# Altium PCB RiscPC_VRAM.PcbDoc (part 2 of 2)
Units mm, origin at the board's own origin, x right, y up, seen from the top; angles counter-clockwise.
Board outline 102.87 x 28 mm, 4 copper layers (Top Layer, Inner 1, Inner 2, Bottom Layer), stack 2.173 mm thick; 29 components, 122 nets, 498 pads, 421 vias.
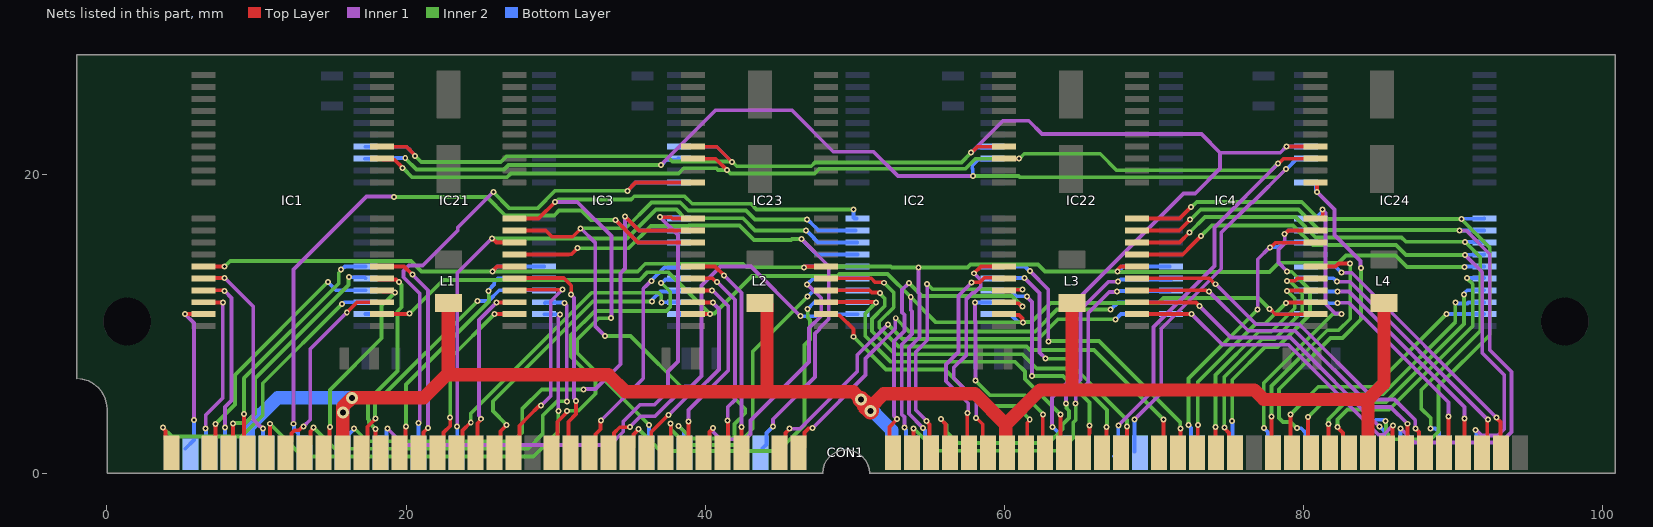
[diagram p4: the nets of this part, all layers, seen from the top]

## Via types
v1: diameter 0.4, hole 0.2, Top Layer to Bottom Layer, tented both sides, 347 vias
v2: diameter 0.8, hole 0.4, Top Layer to Bottom Layer, tented both sides, 46 vias
v3: diameter 0.6, hole 0.3, Top Layer to Bottom Layer, tented both sides, 28 vias

## Nets (pads, with @x,y where several pads share a name; then routed paths per layer and width w, separated by ;. In a path a pad name is that pad's centre, name@x,y a point inside that pad or via, vN(x,y) a via of type N, cw(c..) or ccw(c..) an arc to the next point about the centre after c; other vN are vias at no path point) (continued)
Rd16: CON1.B8 IC3.8 IC23.8 | length 46.8
  Top Layer w0.254: v1(34.011,16.942) 35.502,15.45 IC3.8@39.187,15.45
  Inner 1 w0.254: v1(12.471,3.327) 12.471,13.64 17.358,18.527 19.065,18.527 19.076,18.516 19.149,18.516 v1(19.177,18.488)
  Inner 2 w0.254: v1(19.177,18.488) 25.403,18.488 26.634,17.258 29.907,17.258 30.229,17.58 31.721,17.58 32.36,16.942 v1(34.011,16.942)
  Bottom Layer w0.254: v1(12.471,3.327) 12.499,3.299 12.499,2.969 12.797,2.672 12.797,2.326 CON1.B8@12.971,2.152 ; v1(34.011,16.942) 35.502,15.45 IC23.8@38.246,15.45
Rd17: CON1.B10 IC3.9 IC23.9 | length 42
  Top Layer w0.254: v1(34.641,17.175) 35.566,16.25 IC3.9@39.187,16.25
  Inner 1 w0.254: v1(31.859,5.606) 31.887,5.634 31.99,5.634 32.001,5.646 32.671,5.646 34.328,7.303 34.328,13.389 34.641,13.702 v1(34.641,17.175)
  Inner 2 w0.254: v1(16.532,3.023) 17.396,2.159 27.168,2.159 27.76,2.751 27.76,4.316 29.069,5.625 31.84,5.625 v1(31.859,5.606)
  Bottom Layer w0.254: CON1.B10@15.875,1.428 16.153,1.706 16.153,2.604 16.532,2.983 v1(16.532,3.023) ; v1(34.641,17.175) 35.566,16.25 IC23.9@38.246,16.25
Rd18: CON1.B12 IC3.10 IC23.10 | length 39.4
  Top Layer w0.254: v1(36.976,17.136) 37.727,17.136 37.813,17.05 IC3.10@39.187,17.05
  Inner 1 w0.254: v1(18.771,2.997) 19.863,1.905 33.63,1.905 34.519,2.794 34.519,3.48 35.641,4.602 36.606,4.602 37.502,5.498 37.502,6.827 38.173,7.499 38.173,15.939 v1(36.976,17.136)
  Bottom Layer w0.254: CON1.B12@18.263,1.295 18.693,1.726 18.693,2.88 18.771,2.958 v1(18.771,2.997) ; v1(36.976,17.136) 37.004,17.108 IC23.10@38.758,17.108
Rd19: CON1.B14 IC3.13 IC23.13 | length 39.2
  Top Layer w0.254: v1(34.798,18.904) 35.344,19.45 IC3.13@39.062,19.45
  Inner 1 w0.254: v1(20.821,3.361) 20.821,3.401 20.918,3.498 20.918,12.04 19.833,13.125 19.833,13.543 20.19,13.899 21.112,13.899 23.458,16.245 23.458,16.448 v1(25.832,18.821)
  Inner 2 w0.254: v1(25.832,18.821) 26.924,17.729 28.778,17.729 29.953,18.904 v1(34.798,18.904)
  Bottom Layer w0.254: v1(20.821,3.361) 20.821,1.414 CON1.B14@21.052,1.183 ; v1(34.798,18.904) 35.344,19.45 IC23.13@38.174,19.45
Rd20: CON1.B26 IC3.35 IC23.35 | length 47.4
  Top Layer w0.254: IC3.35@27.143,17.05 28.861,17.05 v1(29.972,18.161)
  Inner 1 w0.254: v1(29.972,18.161) 31.447,18.161 33.728,15.88 33.728,10.403 v1(33.709,10.384)
  Inner 2 w0.254: v1(29.972,18.161) 30.012,18.161 30.18,18.33 35.045,18.33 35.258,18.542 38.621,18.542 39.129,18.034 43.053,18.034 43.434,17.653 v1(49.911,17.653) ; v1(33.709,10.384) 32.863,10.384 31.445,8.966 31.445,8.063 v1(36.25,3.258)
  Bottom Layer w0.254: v1(36.25,3.258) 36.25,1.225 CON1.B26@36.322,1.153 ; v1(49.911,17.653) 49.911,17.123 49.986,17.048 IC23.35@50.105,17.048
Rd21: CON1.B28 IC3.36 IC23.36 | length 52.1
  Top Layer w0.254: IC3.36@27.262,16.25 29.34,16.25 29.757,15.833 31.145,15.833 31.675,16.363 v1(31.675,16.393)
  Inner 1 w0.254: v1(31.675,16.393) 32.654,15.414 32.654,9.835 33.294,9.195 v1(33.299,9.195)
  Inner 2 w0.254: v1(31.675,16.393) 34.681,16.393 36.398,18.11 38.335,18.11 38.868,17.577 42.73,17.577 43.331,16.976 v1(46.808,16.976) ; v1@33.315,9.195 35.001,9.195 38.862,5.334 41.656,5.334 42.672,4.318 42.672,4.028 41.951,3.307 41.951,2.486 41.803,2.337 39.051,2.337 38.868,2.519 38.868,2.534 v1(38.227,3.175)
  Bottom Layer w0.254: v1(38.227,3.175) 38.572,2.83 CON1.B28@38.572,1.443 ; v1(46.808,16.976) 46.837,16.976 47.317,16.496 47.33,16.496 47.576,16.25 IC23.36@50.047,16.25
Rd22: CON1.B16 IC3.37 IC23.37 | length 43.3
  Top Layer w0.254: v1(25.73,15.723) 25.77,15.723 26.042,15.45 IC3.37@27.195,15.45
  Inner 1 w0.254: v1(23.417,3.141) 23.417,13.41 v1(25.73,15.723)
  Inner 2 w0.254: v1(25.73,15.723) 34.773,15.723 36.703,17.653 38.074,17.653 38.658,17.069 42.52,17.069 43.333,16.256 v1(46.736,16.256)
  Bottom Layer w0.254: v1(23.417,3.141) 23.417,1.358 CON1.B16@23.566,1.209 ; v1(46.736,16.256) 46.774,16.256 47.276,15.754 47.276,15.716 47.542,15.45 IC23.37@50.147,15.45
Rd23: CON1.B32 IC3.38 IC23.38 | length 41.1
  Top Layer w0.254: IC3.38@27.262,14.65 30.869,14.65 30.875,14.656 31.055,14.656 31.461,15.062 v1(31.471,15.062)
  Inner 1 w0.254: v1(44.522,3.141) 44.522,3.628 47.346,6.452 47.346,9.366 47.653,9.673 47.653,9.723 48.26,10.331 48.26,13.856 v1(46.446,15.67)
  Inner 2 w0.254: v1(31.471,15.062) 34.874,15.062 36.367,16.555 38.882,16.555 38.91,16.583 42.287,16.583 43.253,15.617 45.738,15.617 45.791,15.67 v1(46.446,15.67)
  Bottom Layer w0.254: CON1.B32@43.815,1.671 44.093,1.949 44.093,2.712 v1(44.522,3.141) ; v1(46.446,15.67) 46.446,15.663 47.459,14.65 IC23.38@50.171,14.65
Rd24: CON1.B51 IC4.8 IC24.8 | length 21.5
  Top Layer w0.254: v1(77.764,15.113) 77.803,15.113 78.112,15.422 80.759,15.422 IC4.8@80.787,15.45
  Inner 1 w0.254: v1(76.937,10.973) 76.937,14.325 77.724,15.113 v1(77.764,15.113)
  Inner 2 w0.254: v1(72.314,3.251) 72.314,6.35 v1(76.937,10.973)
  Bottom Layer w0.254: v1(72.314,3.251) 72.314,3.212 72.479,3.046 72.479,2.411 CON1.B51@73.035,1.855 ; v1(77.764,15.113) 77.792,15.141 78.334,15.141 78.643,15.45 IC24.8@80.162,15.45
Rd25: CON1.B53 IC4.9 IC24.9 | length 21.7
  Top Layer w0.254: v1(78.74,16.003) 78.99,16.253 80.784,16.253 IC4.9@80.787,16.25
  Inner 1 w0.254: v1(78.74,16.003) 78.74,15.385 78.327,14.973 78.327,14.097 v1(78.908,13.516)
  Inner 2 w0.254: v1(75.235,3.505) 75.235,6.274 77.425,8.464 78.264,8.464 80.425,10.625 80.425,12.272 79.209,13.488 78.936,13.488 v1(78.908,13.516)
  Bottom Layer w0.254: v1(75.235,3.505) 75.254,3.486 75.254,2.176 CON1.B53@75.53,1.9 ; v1(78.74,16.003) 78.74,16.009 78.981,16.25 IC24.9@80.162,16.25
Rd26: CON1.B55 IC4.10 IC24.10 | length 21.7
  Top Layer w0.254: IC4.10@80.787,17.05 81.207,17.05 81.28,17.123 v1(81.28,17.653)
  Inner 1 w0.254: v1(81.28,17.653) 81.28,17.613 81.46,17.433 81.46,11.352 82.117,10.696 82.513,10.696 v1(82.541,10.668)
  Inner 2 w0.254: v1(77.343,3.048) 77.343,6.052 81.959,10.668 v1(82.541,10.668)
  Bottom Layer w0.254: v1(77.343,3.048) 77.627,2.764 77.627,2.307 CON1.B55@77.978,1.956 ; IC24.10@80.162,17.05 80.762,17.05 81.252,17.54 81.252,17.625 v1(81.28,17.653)
Rd27: CON1.B57 IC4.13 IC24.13 | length 24.8
  Top Layer w0.254: IC4.13@80.787,19.45 80.826,19.45 80.899,19.377 v1(80.899,18.821)
  Inner 1 w0.254: v1(80.899,18.821) 82.067,17.653 82.067,15.951 83.817,14.201 83.817,13.769 v1(83.845,13.741)
  Inner 2 w0.254: v1(79.562,3.048) 79.523,3.048 79.132,3.438 78.626,3.438 78.359,3.706 78.359,5.632 81.795,9.067 82.6,9.067 83.845,10.312 v1(83.845,13.741)
  Bottom Layer w0.254: v1(79.562,3.048) 79.584,3.026 79.854,3.026 80.142,2.739 80.142,1.503 CON1.B57@80.391,1.254 ; IC24.13@80.162,19.45 80.762,19.45 80.835,19.377 80.835,18.924 80.899,18.861 v1(80.899,18.821)
Rd28: CON1.B60 IC4.35 IC24.35 | length 48.6
  Top Layer w0.254: IC4.35@68.862,17.05 71.707,17.05 v1(72.477,17.82)
  Inner 2 w0.254: v1(72.477,17.82) 72.517,17.82 72.858,18.161 79.879,18.161 81.022,17.018 v1(90.551,17.018) 92.456,15.113 92.456,9.271 89.027,5.842 89.027,2.794 88.519,2.286 85.966,2.286 85.517,2.735 85.517,3.336 85.499,3.355 85.499,3.477 v1(85.471,3.505)
  Bottom Layer w0.254: CON1.B60@84.317,1.393 84.023,1.687 84.506,2.169 84.506,3.273 84.828,3.595 85.342,3.595 85.431,3.505 v1(85.471,3.505) ; v1(90.551,17.018) 90.567,17.034 92.071,17.034 IC24.35@92.087,17.05
Rd29: CON1.B62 IC4.36 IC24.36 | length 49.4
  Top Layer w0.254: IC4.36@68.862,16.25 71.689,16.25 v1(72.424,16.984)
  Inner 1 w0.254: v1(86.487,3.023) 87.427,2.083 93.218,2.083 93.904,2.769 93.904,6.807 92.456,8.255 92.456,14.665 90.893,16.228 90.452,16.228 v1(90.424,16.256)
  Inner 2 w0.254: v1(72.424,16.984) 72.463,16.984 73.132,17.653 79.669,17.653 81.033,16.288 90.288,16.288 90.293,16.284 90.396,16.284 v1(90.424,16.256)
  Bottom Layer w0.254: v1(86.487,3.023) 86.487,1.586 CON1.B62@86.665,1.408 ; v1(90.424,16.256) 90.427,16.253 92.084,16.253 IC24.36@92.087,16.25
Rd30: CON1.B64 IC4.37 IC24.37 | length 41.7
  Top Layer w0.254: IC4.37@68.862,15.45 71.711,15.45 v1(72.39,16.129)
  Inner 2 w0.254: v1(72.39,16.129) 73.406,17.145 79.246,17.145 ; 79.247,17.144 79.459,17.144 80.823,15.78 86.556,15.78 86.843,15.494 v1(90.805,15.494) 91.821,14.478 91.821,9.525 87.865,5.569 87.865,4.348 88.504,3.709 v1(88.504,3.013)
  Bottom Layer w0.254: v1(88.504,3.013) 88.508,3.008 88.813,3.008 89.057,2.764 89.057,1.519 CON1.B64@89.281,1.295 ; v1(90.805,15.494) 90.827,15.472 92.065,15.472 IC24.37@92.087,15.45
Rd31: CON1.B66 IC4.38 IC24.38 | length 40.7
  Top Layer w0.254: IC4.38@68.862,14.65 71.927,14.65 72.555,15.278 v1(73.152,15.875)
  Inner 1 w0.254: v1(90.805,14.605) 91.948,13.462 91.948,8.052 93.421,6.579 93.421,2.972 92.989,2.54 91.917,2.54 91.546,2.911 v1(91.507,2.911)
  Inner 2 w0.254: v1(73.152,15.875) 73.861,16.584 78.981,16.584 ; 78.981,16.583 79.302,16.583 80.613,15.272 86.18,15.272 86.848,14.605 v1(90.805,14.605)
  Bottom Layer w0.254: v1(90.805,14.605) 90.827,14.627 92.065,14.627 IC24.38@92.087,14.65 ; v1(91.507,2.911) 91.507,2.872 91.574,2.804 CON1.B66@91.574,2.098
Sc: CON1.B36 IC1.2 IC2.2 IC3.2 IC4.2 IC21.2 IC22.2 IC23.2 IC24.2 | length 91.6
  Top Layer w0.254: IC1.2@18.239,10.659 18.252,10.672 20.222,10.672 v1(20.244,10.693) ; IC3.2@39.194,10.659 40.323,10.659 v1(40.332,10.668) ; IC2.2@60.022,10.659 60.086,10.595 60.982,10.595 61.212,10.365 61.212,10.135 v1(61.24,10.107) ; v1(77.724,10.998) 77.764,10.998 78.112,10.65 IC4.2@80.787,10.65
  Inner 1 w0.254: v1(53.315,3.073) 53.315,3.775 53.137,3.953 53.137,8.636 53.827,9.326 53.827,10.832 53.741,10.918 v1(53.741,11.791)
  Inner 2 w0.254: v1(20.244,10.693) 22.485,12.935 28.572,12.935 28.576,12.939 32.582,12.939 32.586,12.935 35.622,12.935 36.149,13.462 37.519,13.462 40.313,10.668 v1(40.332,10.668) 40.36,10.696 40.617,10.696 43.129,13.208 48.831,13.208 48.959,13.335 52.197,13.335 v1(53.741,11.791) 55.425,10.107 v1(61.24,10.107) 61.265,10.132 61.821,10.132 63.087,11.398 70.3,11.398 70.633,11.73 72.222,11.73 76.992,11.73 v1(77.724,10.998)
  Bottom Layer w0.254: IC21.2@17.278,10.659 17.291,10.672 20.222,10.672 v1(20.244,10.693) ; IC23.2@38.237,10.659 40.323,10.659 v1(40.332,10.668) ; v1(53.315,3.073) 53.315,3.034 53.429,2.919 CON1.B36@53.429,1.077 ; IC22.2@59.861,10.659 60.385,10.659 60.937,10.107 v1(61.24,10.107) ; v1(77.724,10.998) 77.764,10.998 78.112,10.65 IC24.2@80.162,10.65
Se*: CON1.B37 IC1.39 IC2.39 IC3.39 IC4.39 IC21.39 IC22.39 IC23.39 IC24.39 | length 116.3
  Top Layer w0.254: IC1.39@6.462,13.85 6.466,13.846 7.871,13.846 v1(7.874,13.843) ; v1(25.781,13.516) 25.781,13.546 26.081,13.846 27.259,13.846 IC3.39@27.262,13.85 ; v1(46.609,13.789) 46.649,13.789 46.706,13.846 IC2.39@47.974,13.846 ; v1(67.564,13.516) 67.592,13.544 67.592,13.658 67.78,13.846 68.802,13.846 IC4.39@68.805,13.843
  Inner 1 w0.254: v1(54.254,13.767) 54.255,12.099 54.335,12.019 54.335,9.116 53.619,8.4 53.619,3.991 v1(54.562,3.048)
  Inner 2 w0.254: v1(7.874,13.843) 8.246,14.215 20.323,14.215 21.022,13.516 v1(25.781,13.516) 35.483,13.516 35.988,14.021 42.538,14.021 42.77,13.789 v1(46.609,13.789) ; v1@46.628,13.789 47.263,13.789 47.317,13.843 52.407,13.843 52.484,13.767 57.528,13.767 57.731,13.97 62.255,13.97 62.709,13.516 v1@67.497,13.516 ; v1(67.564,13.516) 67.592,13.488 67.695,13.488 67.716,13.467 77.729,13.467 78.359,14.097 82.363,14.097 82.846,14.58 86.155,14.58 86.921,13.813 v1(90.775,13.813)
  Bottom Layer w0.254: v1(25.781,13.516) 26.111,13.846 29.209,13.846 IC21.39@29.213,13.85 ; v1(46.609,13.789) 46.637,13.817 46.71,13.817 46.739,13.846 IC23.39@50.241,13.846 ; v1(54.562,3.048) 54.562,3.008 54.699,2.872 54.699,1.28 CON1.B37@54.864,1.115 ; v1(67.564,13.516) 67.604,13.516 67.934,13.846 IC22.39@71.056,13.846 ; v1(90.775,13.813) 90.794,13.832 92.069,13.832 IC24.39@92.087,13.85
Ud0: CON1.A1 IC21.3 | length 20.6
  Top Layer w0.254: v1(3.734,3.073) 3.734,3.034 3.907,2.861 3.907,2.326 CON1.A1@4.582,1.651
  Inner 2 w0.254: v1(3.734,3.073) 4.34,2.467 9.006,2.467 10.414,3.875 10.414,6.036 v1(15.716,11.339)
  Bottom Layer w0.254: v1(15.716,11.339) 15.756,11.339 15.867,11.45 IC21.3@17.288,11.45
Ud1: CON1.A3 IC21.4 | length 16.4
  Top Layer w0.254: CON1.A3@7.172,2.32 7.253,2.401 v1(7.253,3.305)
  Inner 2 w0.254: v1(7.253,3.305) 8.56,4.612 8.56,6.587 v1(14.766,12.793)
  Bottom Layer w0.254: v1(14.766,12.793) 15.309,12.25 IC21.4@17.288,12.25
Ud2: CON1.A4 IC21.5 | length 16.7
  Top Layer w0.254: CON1.A4@8.125,1.393 8.433,1.701 v1(8.433,3.353)
  Inner 2 w0.254: v1(8.433,3.353) 8.461,3.381 9.274,3.381 9.906,4.013 9.906,6.35 16.155,12.599 16.155,13.124 v1(16.183,13.152)
  Bottom Layer w0.254: v1(16.183,13.152) 16.223,13.152 16.252,13.123 17.215,13.123 IC21.5@17.288,13.05
Ud3: CON1.A5 IC21.6 | length 16.8
  Top Layer w0.254: v1(9.169,3.988) 9.169,1.786 CON1.A5@9.525,1.43
  Inner 2 w0.254: v1(9.169,3.988) 9.169,6.375 15.494,12.7 15.494,13.428 15.661,13.595 v1(15.661,13.634)
  Bottom Layer w0.254: v1(15.661,13.634) 15.7,13.634 15.912,13.846 17.284,13.846 IC21.6@17.288,13.85
Ud4: CON1.A13 IC21.40 | length 17.1
  Top Layer w0.254: CON1.A13@19.66,1.728 19.963,2.032 19.963,3.123 v1(19.99,3.15)
  Inner 2 w0.254: v1(19.99,3.15) 19.99,5.954 25.546,11.509 25.546,11.763 25.53,11.779 25.53,12.189 v1(25.502,12.217)
  Bottom Layer w0.254: v1(25.502,12.217) 25.502,12.257 25.889,12.644 25.889,12.782 26.145,13.038 IC21.40@29.258,13.038
Ud5: CON1.A11 IC21.41 | length 18.2
  Top Layer w0.254: CON1.A11@17.374,1.159 17.423,1.208 17.423,3.126 17.958,3.661 v1(17.958,3.683)
  Inner 2 w0.254: v1(17.958,3.683) 17.93,3.711 17.93,4.671 v1(24.79,11.532)
  Bottom Layer w0.254: v1(24.79,11.532) 25.513,11.532 26.231,12.25 IC21.41@29.267,12.25
Ud6: CON1.A8 IC21.42 | length 29
  Top Layer w0.254: CON1.A8@13.462,1.775 13.613,1.926 13.613,2.829 13.818,3.034 v1(13.818,3.073)
  Inner 1 w0.254: v1(30.607,11.405) 30.607,11.365 30.743,11.229 v1(30.743,4.826)
  Inner 2 w0.254: v1(13.818,3.073) 15.24,1.651 28.143,1.651 29.13,2.638 29.13,3.857 30.099,4.826 v1(30.743,4.826)
  Bottom Layer w0.254: IC21.42@29.292,11.405 29.314,11.427 30.584,11.427 v1(30.607,11.405)
Ud7: CON1.A6 IC21.43 | length 31.9
  Top Layer w0.254: CON1.A6@10.665,1.393 10.897,1.625 v1(10.897,3.327)
  Inner 1 w0.254: v1(30.18,4.191) 30.18,10.481 30.302,10.603 v1(30.302,10.643)
  Inner 2 w0.254: v1(10.897,3.327) 13.081,1.143 28.524,1.143 30.18,2.799 v1(30.18,4.191)
  Bottom Layer w0.254: IC21.43@29.246,10.65 29.881,10.65 29.886,10.646 30.299,10.646 v1(30.302,10.643)
Ud8: CON1.A43 IC22.3 | length 14.3
  Top Layer w0.254: v1(62.567,3.955) 62.567,1.553 CON1.A43@62.727,1.393
  Inner 1 w0.254: v1(58.039,11.43) 58.039,10.215 58.067,10.187 v1(58.067,6.232)
  Inner 2 w0.254: v1(58.067,6.232) 58.067,6.198 59.026,5.238 61.337,5.238 62.494,4.081 62.494,4.068 62.567,3.995 v1(62.567,3.955)
  Bottom Layer w0.254: v1(58.039,11.43) 58.049,11.44 IC22.3@59.039,11.44
Ud9: CON1.A45 IC22.4 | length 16
  Top Layer w0.254: CON1.A45@65.259,1.401 65.675,1.818 65.675,2.683 65.684,2.692 v1(65.684,3.226)
  Inner 1 w0.254: v1(61.519,11.836) 61.519,11.797 61.849,11.467 61.849,7.884 61.852,7.881 v1(61.852,6.511)
  Inner 2 w0.254: v1(61.852,6.511) 63.923,6.511 65.684,4.75 v1(65.684,3.226)
  Bottom Layer w0.254: IC22.4@59.204,12.25 60.41,12.25 60.811,11.849 61.506,11.849 v1(61.519,11.836)
Ud10: CON1.A47 IC22.5 | length 17.2
  Top Layer w0.254: CON1.A47@67.853,1.964 68.199,2.31 v1(68.199,3.15)
  Inner 1 w0.254: v1(61.341,13.081) 62.357,12.065 62.357,8.094 62.738,7.713 v1(62.738,7.674)
  Inner 2 w0.254: v1(62.738,7.674) 64.106,7.674 68.199,3.581 v1(68.199,3.15)
  Bottom Layer w0.254: IC22.5@59.041,13.038 60.633,13.038 60.675,13.081 v1(61.341,13.081)
Ud11: CON1.A50 IC22.6 | length 20.4
  Top Layer w0.254: CON1.A50@71.704,2.005 71.78,2.081 v1(71.78,2.997)
  Inner 1 w0.254: v1(61.722,13.529) 62.938,12.313 v1(62.938,8.836)
  Inner 2 w0.254: v1(62.938,8.836) 62.966,8.864 66.335,8.864 71.752,3.446 71.752,3.025 v1(71.78,2.997)
  Bottom Layer w0.254: IC22.6@59.197,13.843 61.368,13.843 61.682,13.529 v1(61.722,13.529)
Ud12: CON1.A38 IC22.40 | length 27.3
  Top Layer w0.254: v1(55.778,3.632) 55.778,3.593 56.067,3.304 CON1.A38@56.067,1.608
  Inner 1 w0.254: v1(64.116,4.69) 64.116,5.29 65.097,6.271 65.097,10.951 66.968,12.822 v1(67.609,12.822)
  Inner 2 w0.254: v1(55.778,3.632) 56.146,3.265 56.146,2.783 56.897,2.032 62.95,2.032 63.881,2.963 63.881,3.27 64.327,3.716 64.327,4.197 64.144,4.38 64.144,4.662 v1(64.116,4.69)
  Bottom Layer w0.254: v1(67.609,12.822) 67.649,12.822 67.804,12.977 71.131,12.977 IC22.40@71.244,13.09
Ud13: CON1.A36 IC22.41 | length 27.7
  Top Layer w0.254: CON1.A36@53.709,2.044 53.924,2.259 v1(53.924,3.023)
  Inner 1 w0.254: v1(64.77,4.69) 64.77,5.258 65.605,6.093 65.605,10.741 67.008,12.144 67.511,12.144 v1(67.539,12.172)
  Inner 2 w0.254: v1(53.924,3.023) 55.423,1.524 63.778,1.524 64.608,2.354 64.608,3.421 64.77,3.583 v1(64.77,4.69)
  Bottom Layer w0.254: v1(67.539,12.172) 67.567,12.2 71.079,12.2 IC22.41@71.129,12.25
Ud14: CON1.A34 IC22.42 | length 31.4
  Top Layer w0.254: CON1.A34@46.225,1.393 46.633,1.801 46.633,2.742 46.911,3.02 47.14,3.02 v1(47.168,3.048)
  Inner 1 w0.254: v1(47.168,3.048) 47.193,3.048 50.724,6.579 50.724,7.696 52.71,9.682 52.71,10.353 v1(52.738,10.381)
  Inner 2 w0.254: v1(52.738,10.381) 53.621,9.498 62.06,9.498 63.518,10.956 v1(67.111,10.956)
  Bottom Layer w0.254: v1(67.111,10.956) 67.595,11.44 IC22.42@71.175,11.44
Ud15: CON1.A33 IC22.43 | length 31
  Top Layer w0.254: CON1.A33@45.315,2.363 45.363,2.411 45.363,2.702 45.618,2.958 v1(45.618,2.997)
  Inner 1 w0.254: v1(45.618,2.997) 46.338,2.998 50.169,6.829 50.169,7.918 v1(52.215,9.964)
  Inner 2 w0.254: v1(52.215,9.964) 53.189,8.99 62.271,8.99 63.59,10.309 v1(67.415,10.309)
  Bottom Layer w0.254: v1(67.415,10.309) 67.454,10.309 67.804,10.659 IC22.43@71.257,10.659
Ud16: CON1.A16 IC23.3 | length 20.4
  Top Layer w0.254: CON1.A16@23.368,1.638 23.773,2.043 23.773,2.873 v1(24.324,3.423)
  Inner 2 w0.254: v1(24.324,3.423) 24.324,4.004 32.407,12.087 36.867,12.087 37.056,11.899 37.056,11.468 v1(37.084,11.44)
  Bottom Layer w0.254: v1(37.084,11.44) 37.089,11.445 38.069,11.445 IC23.3@38.074,11.45
Ud17: CON1.A18 IC23.4 | length 19
  Top Layer w0.254: CON1.A18@25.976,2.074 26.313,2.411 26.313,2.829 v1(26.73,3.246)
  Inner 2 w0.254: v1(26.73,3.246) 25.806,4.169 25.806,4.833 32.48,11.506 v1(36.433,11.506)
  Bottom Layer w0.254: v1(36.433,11.506) 36.461,11.534 36.461,11.639 36.999,12.177 38.173,12.177 IC23.4@38.246,12.25
Ud18: CON1.A21 IC23.5 | length 20.1
  Top Layer w0.254: CON1.A21@29.718,2.027 29.739,2.027 30.123,2.411 30.123,3.464 30.718,4.059 30.718,4.164 v1(30.746,4.192)
  Inner 2 w0.254: v1(30.746,4.192) 31.523,4.192 32.664,5.334 32.664,6.172 31.013,7.823 31.013,9.253 32.62,10.859 37.402,10.859 37.665,11.122 37.665,12.15 37.089,12.726 v1(37.049,12.726)
  Bottom Layer w0.254: v1(37.049,12.726) 37.089,12.726 37.339,12.977 38.077,12.977 IC23.5@38.112,13.012
Ud19: CON1.A23 IC23.6 | length 15.3
  Top Layer w0.254: CON1.A23@32.255,1.393 32.663,1.801 32.663,2.626 32.992,2.955 32.992,3.503 v1(33.02,3.531)
  Inner 1 w0.254: v1(33.02,3.531) 35.852,6.363 35.852,12.36 36.073,12.58 36.374,12.881 v1(36.414,12.881)
  Bottom Layer w0.254: v1(36.414,12.881) 36.414,12.919 37.272,13.777 38.008,13.777 IC23.6@38.078,13.846
Ud20: CON1.A29 IC23.40 | length 20.7
  Top Layer w0.254: CON1.A29@40.132,1.695 40.283,1.846 40.283,2.778 40.513,3.008 v1(40.513,3.048)
  Inner 1 w0.254: v1(40.513,3.048) 40.541,3.02 40.541,2.766 41.021,2.286 42.672,2.286 43.028,2.642 43.028,3.549 46.939,7.46 46.939,9.728 47.752,10.541 47.752,11.683 47.752,11.731 47.082,12.401 47.074,12.401 46.876,12.599 46.836,12.599 v1(46.808,12.627)
  Bottom Layer w0.254: v1(46.808,12.627) 47.286,13.105 IC23.40@50.274,13.105
Ud21: CON1.A27 IC23.41 | length 22
  Top Layer w0.254: CON1.A27@37.444,2.112 37.694,2.362 v1(37.694,3.353)
  Inner 2 w0.254: v1(37.694,3.353) 37.722,3.325 37.722,2.948 38.764,1.905 42.088,1.905 43.174,2.991 43.174,8.152 v1(46.841,11.82)
  Bottom Layer w0.254: v1(46.841,11.82) 47.272,12.25 IC23.41@50.171,12.25
Ud22: CON1.A25 IC23.42 | length 25.9
  Top Layer w0.254: CON1.A25@34.795,1.393 35.203,1.801 35.203,2.601 35.535,2.932 v1(35.535,2.972)
  Inner 2 w0.254: v1(35.535,2.972) 37.008,1.499 44.882,1.499 46.634,3.251 46.634,8.582 47.015,8.963 47.015,10.274 46.857,10.431 46.857,10.958 v1(46.829,10.986)
  Bottom Layer w0.254: v1(46.829,10.986) 47.293,11.45 IC23.42@50.295,11.45
Ud23: CON1.A24 IC23.43 | length 26.9
  Top Layer w0.254: CON1.A24@33.427,1.905 33.91,2.388 33.91,2.719 34.287,3.096 34.948,3.096 v1(34.976,3.124)
  Inner 1 w0.254: v1(34.976,3.124) 35.676,3.825 36.651,3.825 38.649,5.823 39.058,5.823 39.751,6.515 39.751,12.573 41.021,13.843 43.053,13.843 v1(46.38,10.516)
  Bottom Layer w0.254: v1(46.38,10.516) 47.371,10.516 47.505,10.65 IC23.43@50.171,10.65
Ud24: CON1.A64 IC24.3 | length 15.7
  Top Layer w0.254: CON1.A64@89.1,1.621 89.662,2.183 89.662,2.234 89.687,2.259 v1(89.687,3.81)
  Inner 1 w0.254: v1(82.282,11.389) 82.31,11.416 82.734,11.416 82.736,11.418 83.037,11.418 89.687,4.768 v1(89.687,3.81)
  Bottom Layer w0.254: IC24.3@80.162,11.45 80.172,11.44 81.574,11.44 81.626,11.389 v1(82.282,11.389)
Ud25: CON1.A65 IC24.4 | length 16.9
  Top Layer w0.254: CON1.A65@90.667,1.393 90.754,1.48 90.754,3.683 v1(90.76,3.689)
  Inner 1 w0.254: v1(82.266,12.162) 83.044,12.162 90.76,4.447 v1(90.76,3.689)
  Bottom Layer w0.254: IC24.4@80.162,12.25 81.534,12.25 81.622,12.162 v1(82.266,12.162)
Ud26: CON1.A66 IC24.5 | length 17.6
  Top Layer w0.254: CON1.A66@92.075,2.159 92.28,2.364 92.28,3.528 92.331,3.579 v1(92.331,3.619)
  Inner 1 w0.254: v1(82.239,12.844) 82.267,12.816 83.108,12.816 92.306,3.619 v1(92.331,3.619)
  Bottom Layer w0.254: IC24.5@80.162,13.05 81.994,13.05 82.199,12.844 v1(82.239,12.844)
Ud27: CON1.A67 IC24.6 | length 19.2
  Top Layer w0.254: v1(92.913,3.734) 92.913,3.694 93.167,3.44 CON1.A67@93.167,1.619
  Inner 1 w0.254: v1(82.541,13.425) 83.222,13.425 v1(92.913,3.734)
  Bottom Layer w0.254: IC24.6@80.162,13.85 80.166,13.846 82.119,13.846 v1(82.541,13.425)
Ud28: CON1.A59 IC24.40 | length 18.7
  Top Layer w0.254: v1(82.271,3.124) 82.271,3.085 82.639,2.716 82.639,1.801 CON1.A59@83.047,1.393
  Inner 2 w0.254: v1(82.271,3.124) 82.271,3.609 82.943,4.281 85.256,4.281 85.728,4.281 91.313,9.866 91.313,12.66 90.932,13.041 v1(90.932,13.081)
  Bottom Layer w0.254: v1(90.932,13.081) 90.948,13.065 92.072,13.065 IC24.40@92.087,13.05
Ud29: CON1.A58 IC24.41 | length 17.7
  Top Layer w0.254: v1(81.661,3.302) 81.661,1.685 81.777,1.801 CON1.A58@81.777,1.393
  Inner 2 w0.254: v1(81.661,3.302) 81.661,3.632 82.818,4.789 85.518,4.789 90.732,10.004 v1(90.732,11.954)
  Bottom Layer w0.254: v1(90.732,11.954) 90.76,11.982 90.76,12.062 90.948,12.25 IC24.41@92.087,12.25
Ud30: CON1.A57 IC24.42 | length 18.2
  Top Layer w0.254: v1(80.307,3.767) 80.307,1.593 80.407,1.493 CON1.A57@80.507,1.393
  Inner 2 w0.254: v1(80.307,3.767) 81.838,5.297 85.307,5.297 90.151,10.141 v1(90.151,11.43)
  Bottom Layer w0.254: v1(90.151,11.43) 90.191,11.43 90.248,11.373 90.973,11.373 91.04,11.44 92.077,11.44 IC24.42@92.087,11.45
Ud31: CON1.A56 IC24.43 | length 18.8
  Top Layer w0.254: v1(79.121,3.937) 79.121,1.685 78.829,1.393 CON1.A56@79.237,1.393
  Inner 2 w0.254: v1(79.121,3.937) 80.989,5.805 84.707,5.805 v1(89.57,10.668)
  Bottom Layer w0.254: v1(89.57,10.668) 89.579,10.659 92.078,10.659 IC24.43@92.087,10.65
VCC: CON1.A10 CON1.A41 CON1.A60 CON1.B5 CON1.B35 L1.1 L2.1 L3.1 L4.1 | length 120
  Top Layer w0.889: CON1.A10@15.773,1.372 15.773,4.451 v2(16.383,5.061) 21.19,5.061 22.733,6.604 ; L1.1@22.825,11.4 22.825,6.696 22.733,6.604 ; L2.1@43.675,11.4 43.975,11.4 44.13,11.244 44.13,5.461 ; v2(50.419,4.953) 49.911,5.461 44.13,5.461 ; v2@50.99,4.381 51.943,5.334 58.039,5.334 60.097,3.277 ; CON1.A41@60.187,1.393 60.097,1.483 60.097,3.277 ; L3.1@64.525,11.4 64.525,5.724 64.389,5.588 ; 84.201,4.953 77.343,4.953 76.708,5.588 64.389,5.588 ; CON1.A60@84.317,1.393 84.317,4.953 85.375,6.011 L4.1@85.375,11.4 ; 22.733,6.604 33.528,6.604 34.671,5.461 44.13,5.461 ; 60.097,3.277 62.408,5.588 64.389,5.588
  Top Layer w1.143: v2(50.419,4.953) 50.673,4.699 50.673,4.572 v2(51.054,4.191)
  Bottom Layer w0.889: CON1.B5@9.305,1.411 9.463,1.57 9.463,3.113 11.411,5.061 15.773,5.061 ; v2(15.773,4.089) 15.773,4.801 16.034,5.061 v2(16.383,5.061) ; v2(50.419,4.953) 52.477,2.895 52.477,1.703 CON1.B35@52.658,1.522
Vcd0: CON1.A7 IC1.3 | length 13.3
  Top Layer w0.254: CON1.A7@12.065,1.91 12.343,2.188 12.343,2.691 12.538,2.886 12.829,2.886 13.092,3.15 v1(13.132,3.15) ; v1(16.034,10.767) 16.717,11.45 IC1.3@18.387,11.45
  Inner 1 w0.254: v1(13.132,3.15) 13.143,3.15 13.589,3.596 13.589,8.322 v1(16.034,10.767)
Vcd1: CON1.A9 IC1.4 | length 13.6
  Top Layer w0.254: CON1.A9@14.475,1.393 14.883,1.801 14.883,3.072 v1(14.91,3.099) ; IC1.4@18.387,12.25 18.46,12.177 19.135,12.177 19.21,12.102 v1(19.25,12.102)
  Inner 2 w0.254: v1(14.91,3.099) 14.91,5.588 18.364,9.042 18.364,11.216 v1(19.25,12.102)
Vcd2: CON1.A12 IC1.5 | length 14.2
  Top Layer w0.254: v1(17.958,2.972) 17.958,1.72 CON1.A12@18.285,1.393 ; IC1.5@18.117,12.977 19.318,12.977 19.493,12.802 v1(19.533,12.802)
  Inner 2 w0.254: v1(17.958,2.972) 17.517,3.413 17.517,3.576 17.456,3.637 17.456,4.883 19.425,6.852 19.425,10.851 19.691,11.117 19.691,12.603 19.533,12.762 v1(19.533,12.802)
Vcd3: CON1.A14 IC1.6 | length 14.8
  Top Layer w0.254: IC1.6@18.387,13.85 18.391,13.846 19.87,13.846 v1(20.414,13.302) ; CON1.A14@21.082,1.374 21.172,1.464 21.172,2.757 v1(21.463,3.048)
  Inner 1 w0.254: v1(20.414,13.302) 21.463,12.254 v1(21.463,3.048)
Vcd4: CON1.B6 IC1.40 | length 14.5
  Top Layer w0.254: IC1.40@6.462,13.05 6.478,13.065 7.858,13.065 v1(7.874,13.081)
  Inner 1 w0.254: v1(7.874,13.081) 9.779,11.176 9.779,3.614 10.244,3.15 10.273,3.15 10.403,3.019 v1(10.443,3.019)
  Bottom Layer w0.254: v1(10.443,3.019) 10.443,2.023 CON1.B6@11.073,1.393
Vcd5: CON1.B4 IC1.41 | length 12.7
  Top Layer w0.254: IC1.41@6.462,12.25 7.777,12.25 7.834,12.192 v1(7.874,12.192)
  Inner 1 w0.254: v1(7.874,12.192) 8.328,11.738 8.328,4.874 7.899,4.445 v1(7.899,3.073)
  Bottom Layer w0.254: v1(7.899,3.073) 7.899,1.619 CON1.B4@8.125,1.393
Vcd6: CON1.B3 IC1.42 | length 11.9
  Top Layer w0.254: IC1.42@6.462,11.45 6.472,11.44 7.737,11.44 v1(7.747,11.43)
  Inner 1 w0.254: v1(6.604,2.997) 6.604,3.912 7.747,5.055 v1(7.747,11.43)
  Bottom Layer w0.254: v1(6.604,2.997) 6.632,2.969 6.632,1.616 CON1.B3@6.855,1.393
Vcd7: CON1.B2 IC1.43 | length 10.8
  Top Layer w0.254: v1(5.207,10.668) 5.216,10.659 6.453,10.659 IC1.43@6.462,10.65
  Inner 1 w0.254: v1(5.207,10.668) 5.817,10.058 v1(5.817,3.581)
  Bottom Layer w0.254: CON1.B2@5.233,1.651 5.817,2.235 v1(5.817,3.581)
Vcd8: CON1.A35 IC2.3 | length 21.4
  Top Layer w0.254: CON1.A35@52.324,1.675 52.324,3.12 52.81,3.606 v1(52.81,3.635) ; IC2.3@60.053,11.44 60.116,11.377 60.964,11.377 61.184,11.157 v1(61.224,11.157)
  Inner 1 w0.254: v1(52.81,3.635) 52.81,3.675 52.629,3.856 52.629,8.847 53.319,9.537 53.319,10.613 53.16,10.772 53.16,12.286 v1(53.614,12.74)
  Inner 2 w0.254: v1(53.614,12.74) 53.629,12.74 54.497,11.871 60.509,11.871 v1(61.224,11.157)
Vcd9: CON1.A37 IC2.4 | length 19.6
  Top Layer w0.254: v1(54.799,3.526) 54.799,3.487 55.004,3.282 55.004,1.815 CON1.A37@54.864,1.675 ; IC2.4@59.987,12.225 60.053,12.291 61.186,12.291 v1(61.214,12.319)
  Inner 1 w0.254: v1(54.799,3.526) 54.071,4.254 54.071,8.134 54.843,8.905 54.843,12.665 v1(54.836,12.672)
  Inner 2 w0.254: v1(54.836,12.672) 55.189,12.319 v1(61.214,12.319)
Vcd10: CON1.A39 IC2.5 | length 15.8
  Top Layer w0.254: v1(57.534,4.06) 57.516,4.042 57.516,1.524 CON1.A39@57.647,1.393 ; v1(57.816,12.76) 57.844,12.788 58.381,12.788 58.677,13.084 IC2.5@60.682,13.084
  Inner 1 w0.254: v1(57.534,4.06) 57.562,4.088 57.562,4.178 57.579,4.195 57.579,4.697 56.103,6.173 56.103,7.292 56.941,8.13 56.941,11.888 57.813,12.76 v1(57.816,12.76)
Vcd11: CON1.A40 IC2.6 | length 15
  Top Layer w0.254: v1(57.972,13.389) 58.429,13.846 IC2.6@59.793,13.846 ; v1(58.097,3.727) 58.118,3.727 58.556,3.289 58.556,2.326 CON1.A40@58.531,2.3
  Inner 1 w0.254: v1(57.972,13.389) 58.42,12.941 58.42,12.506 58.003,12.088 57.876,12.088 57.458,11.671 57.458,7.928 56.611,7.082 56.611,6.383 58.115,4.879 58.115,3.745 v1(58.097,3.727)
Vcd12: CON1.A49 IC2.40 | length 31
  Top Layer w0.254: IC2.40@48.062,13.05 51.1,13.05 51.368,12.782 51.915,12.782 v1(51.943,12.754) ; CON1.A49@70.245,1.983 70.637,2.375 v1(70.637,3.607)
  Inner 2 w0.254: v1(51.943,12.754) 52.6,12.097 52.6,11.111 51.638,10.149 51.638,9.77 52.926,8.482 61.495,8.482 61.722,8.255 65.989,8.255 v1(70.637,3.607)
Vcd13: CON1.A46 IC2.41 | length 27.6
  Top Layer w0.254: IC2.41@48.062,12.25 50.981,12.25 51.138,12.093 51.661,12.093 v1(51.689,12.065) ; CON1.A46@66.537,1.393 66.827,1.683 v1(66.827,3.124)
  Inner 2 w0.254: v1(51.689,12.065) 51.689,12.025 52.006,11.709 52.006,11.189 51.156,10.339 51.156,9.507 52.688,7.974 61.21,7.974 62.166,7.019 64.076,7.019 66.853,4.242 66.853,3.15 v1(66.827,3.124)
Vcd14: CON1.A44 IC2.42 | length 24.2
  Top Layer w0.254: IC2.42@47.998,11.457 51.397,11.457 v1(51.425,11.43) ; v1(63.746,3.956) 63.746,1.644 CON1.A44@63.997,1.393
  Inner 2 w0.254: v1(51.425,11.43) 50.698,10.704 50.698,9.195 52.427,7.466 60.733,7.466 61.388,6.811 61.388,6.314 v1(63.746,3.956)
Vcd15: CON1.A42 IC2.43 | length 18.6
  Top Layer w0.254: IC2.43@48.662,10.65 48.735,10.577 48.986,10.577 49.911,9.652 v1(49.911,9.144) ; CON1.A42@61.457,1.393 61.526,1.462 61.526,3.397 61.697,3.567 v1(61.697,3.607)
  Inner 2 w0.254: v1(49.911,9.144) 52.095,6.96 56.032,6.96 58.471,4.521 60.782,4.521 v1(61.697,3.607)
Vcd16: CON1.A26 IC3.3 | length 13.6
  Top Layer w0.254: CON1.A26@36.195,1.169 36.386,1.36 36.386,2.77 37.526,3.911 v1(37.558,3.911) ; IC3.3@39.497,11.433 39.506,11.443 40.511,11.443 v1(40.519,11.436)
  Inner 1 w0.254: v1(37.558,3.911) 37.566,3.919 38.963,5.315 39.269,5.315 40.913,6.959 40.913,11.008 40.519,11.403 v1(40.519,11.436)
Vcd17: CON1.A28 IC3.4 | length 13.1
  Top Layer w0.254: CON1.A28@38.723,2.121 38.887,2.285 v1(38.887,3.48) ; IC3.4@39.149,12.267 39.176,12.239 40.45,12.239 v1(40.46,12.229)
  Inner 1 w0.254: v1(38.887,3.48) 38.887,4.242 41.536,6.891 41.536,11.193 40.5,12.229 v1(40.46,12.229)
Vcd18: CON1.A30 IC3.5 | length 13.6
  Top Layer w0.254: IC3.5@39.247,13.026 39.271,13.05 40.495,13.05 40.753,12.793 v1(40.792,12.793) ; CON1.A30@41.497,1.562 41.525,1.59 41.525,3.535 v1(41.504,3.556)
  Inner 1 w0.254: v1(40.792,12.793) 40.81,12.793 41.986,11.616 41.986,4.922 41.504,4.44 v1(41.504,3.556)
Vcd19: CON1.A31 IC3.6 | length 14
  Top Layer w0.254: IC3.6@39.231,13.846 40.662,13.846 v1(41.255,13.255) ; CON1.A31@42.418,1.966 v1(42.418,3.124)
  Inner 1 w0.254: v1(41.255,13.255) 42.422,12.087 42.422,3.128 v1(42.418,3.124)
Vcd20: CON1.A22 IC3.40 | length 16
  Top Layer w0.254: IC3.40@26.806,13.062 30.545,13.062 31.048,12.56 31.048,12 v1(31.023,11.975) ; CON1.A22@30.985,1.393 30.852,1.526 30.852,3.459 31.369,3.977 v1(31.369,4.851)
  Inner 1 w0.254: v1(31.023,11.975) 31.023,11.947 31.217,11.754 31.217,5.043 31.369,4.891 v1(31.369,4.851)
Vcd21: CON1.A19 IC3.41 | length 14.9
  Top Layer w0.254: IC3.41@27.275,12.22 27.346,12.291 30.439,12.291 v1(30.467,12.319) ; CON1.A19@27.432,1.924 27.578,2.07 27.578,3.195 28.24,3.857 28.857,4.474 28.92,4.474 28.993,4.547 v1(29.032,4.547)
  Inner 1 w0.254: v1(29.032,4.547) 29.667,5.182 29.667,11.52 v1(30.467,12.319)
Vcd22: CON1.A17 IC3.42 | length 11.7
  Top Layer w0.254: CON1.A17@24.765,1.73 24.765,3.364 25.023,3.622 v1(25.023,3.661) ; v1(26.035,11.43) 26.045,11.44 27.315,11.44 IC3.42@27.378,11.377
  Inner 1 w0.254: v1(25.023,3.661) 25.023,3.701 24.867,3.857 24.867,10.262 v1(26.035,11.43)
Vcd23: CON1.A15 IC3.43 | length 12.1
  Top Layer w0.254: CON1.A15@22.098,1.515 22.503,1.92 22.503,2.739 22.948,3.184 v1(22.948,3.731) ; v1(25.908,10.668) 25.917,10.659 27.253,10.659 IC3.43@27.262,10.65
  Inner 2 w0.254: v1(22.948,3.731) 22.948,7.708 v1(25.908,10.668)
Vcd24: CON1.A51 IC4.3 | length 14.3
  Top Layer w0.254: CON1.A51@72.873,1.904 72.932,1.963 v1(72.932,3.234) ; v1(78.828,11.409) 78.856,11.437 78.959,11.437 78.962,11.44 80.777,11.44 IC4.3@80.787,11.45
  Inner 2 w0.254: v1(72.932,3.234) 72.932,6.126 76.794,9.988 77.407,9.988 v1(78.828,11.409)
Vcd25: CON1.A52 IC4.4 | length 15.1
  Top Layer w0.254: CON1.A52@74.117,1.878 v1(74.117,3.124) ; v1(78.905,12.208) 78.926,12.229 80.767,12.229 IC4.4@80.787,12.25
  Inner 2 w0.254: v1(74.117,3.124) 74.117,6.593 77.004,9.48 77.843,9.48 79.409,11.046 79.409,11.711 78.912,12.208 v1(78.905,12.208)
Vcd26: CON1.A53 IC4.5 | length 16.6
  Top Layer w0.254: v1(74.701,3.073) 74.701,3.034 75.019,2.716 75.019,1.73 CON1.A53@75.129,1.62 ; v1(78.908,12.862) 78.936,12.89 79.446,12.89 79.606,13.05 IC4.5@80.787,13.05
  Inner 2 w0.254: v1(74.701,3.073) 74.701,6.459 77.214,8.972 78.053,8.972 79.917,10.835 79.917,12.032 79.115,12.834 78.936,12.834 v1(78.908,12.862)
Vcd27: CON1.A55 IC4.6 | length 17.8
  Top Layer w0.254: CON1.A55@77.559,1.393 77.851,1.685 v1(77.851,3.81) ; IC4.6@80.787,13.85 82.144,13.85 82.3,14.006 82.335,14.006 82.363,14.034 v1(83.122,14.034)
  Inner 2 w0.254: v1(77.851,3.81) 77.851,5.842 81.584,9.575 82.346,9.575 83.122,10.351 v1(83.122,14.034)
Vcd28: CON1.A63 IC4.40 | length 24.6
  Top Layer w0.254: IC4.40@68.862,13.05 73.696,13.05 74.092,12.654 v1(74.122,12.654) ; v1(87.503,3.023) 87.503,2.983 87.719,2.767 87.719,1.937 CON1.A63@87.933,1.724
  Inner 1 w0.254: v1(74.122,12.654) 74.154,12.654 76.826,9.982 79.72,9.982 84.749,4.953 86.09,4.953 87.475,3.568 87.475,3.051 v1(87.503,3.023)
Vcd29: CON1.A62 IC4.41 | length 23.1
  Top Layer w0.254: IC4.41@68.862,12.25 73.499,12.25 73.537,12.212 73.64,12.212 v1(73.668,12.184) ; CON1.A62@86.944,2.005 v1(86.944,3.327)
  Inner 1 w0.254: v1(73.668,12.184) 73.716,12.136 76.302,9.55 79.433,9.55 84.538,4.445 85.827,4.445 v1(86.944,3.327)
Vcd30: CON1.B61 IC4.42 | length 21.8
  Top Layer w0.254: IC4.42@68.862,11.45 68.872,11.44 72.812,11.44 v1(73.05,11.201)
  Inner 1 w0.254: v1(73.05,11.201) 75.159,9.093 79.128,9.093 v1@85.068,3.154
  Bottom Layer w0.254: v1(85.076,3.154) 85.404,2.826 85.404,2.411 85.394,2.401 85.189,2.401 85.189,1.403 CON1.B61@85.179,1.393
Vcd31: CON1.A61 IC4.43 | length 22.7
  Top Layer w0.254: IC4.43@68.862,10.65 68.872,10.659 72.508,10.659 v1(72.517,10.668) ; CON1.A61@85.587,1.393 85.951,1.757 85.951,3.172 v1(85.979,3.2)
  Inner 1 w0.254: v1(72.517,10.668) 74.574,8.611 78.995,8.611 85.015,2.591 85.369,2.591 v1(85.979,3.2)
Vras*: CON1.B44 IC1.16 IC2.16 IC3.16 IC4.16 IC21.16 IC22.16 IC23.16 IC24.16 | length 107.6
  Top Layer w0.254: IC1.16@18.379,21.847 20.031,21.847 20.292,21.585 ; 20.292,21.584 20.593,21.284 v1(20.593,21.244) ; IC3.16@39.187,21.85 40.766,21.85 v1(41.776,20.84) ; v1(57.785,21.463) 57.825,21.463 58.212,21.85 IC2.16@59.987,21.85 ; v1(78.867,21.869) 78.877,21.86 80.778,21.86 IC4.16@80.787,21.85
  Inner 1 w0.254: v1(57.785,21.463) 59.906,23.584 61.633,23.584 62.519,22.698 73.171,22.698 74.422,21.447 ; v1(63.22,3.124) 63.192,3.152 63.192,5.076 64.589,6.474 64.589,11.325 71.984,18.72 72.757,18.72 74.422,20.384 74.422,21.447 ; v1(78.867,21.869) 78.445,21.447 74.422,21.447
  Inner 2 w0.254: v1(20.593,21.244) 21.009,20.828 26.333,20.828 26.714,21.209 37.44,21.209 37.794,20.854 41.761,20.854 v1(41.776,20.84) ; v1@41.795,20.86 42.106,20.549 47.092,20.549 47.346,20.803 57.125,20.803 v1(57.785,21.463)
  Bottom Layer w0.254: IC21.16@17.279,21.847 20.031,21.847 20.292,21.585 ; 20.292,21.584 20.593,21.284 v1(20.593,21.244) ; IC23.16@38.246,21.844 40.771,21.844 v1(41.776,20.84) ; v1(57.785,21.463) 57.825,21.463 58.139,21.777 59.131,21.777 IC22.16@59.204,21.85 ; v1(63.22,3.124) 63.618,2.725 63.618,1.337 CON1.B44@63.754,1.201 ; v1(78.867,21.869) 78.877,21.86 80.738,21.86 IC24.16@80.78,21.902
We0*: CON1.B47 IC1.15 IC2.15 IC3.15 IC4.15 | length 91.2
  Top Layer w0.254: IC1.15@18.387,21.05 18.46,20.977 19.233,20.977 19.761,20.448 v1(19.761,20.415) ; IC3.15@39.762,21.05 40.697,21.05 v1(41.453,20.295) ; IC2.15@60.61,21.073 60.633,21.051 v1(60.969,21.051) ; v1(78.308,20.726) 78.348,20.726 78.671,21.05 IC4.15@80.787,21.05
  Inner 1 w0.254: v1(67.615,3.2) 69.977,5.563 69.977,9.804 74.041,13.868 74.041,16.459 v1(78.308,20.726)
  Inner 2 w0.254: v1(19.761,20.415) 19.801,20.415 20.404,19.812 26.753,19.812 27.007,20.066 38.227,20.066 38.566,20.405 40.745,20.405 40.855,20.295 v1(41.453,20.295) 41.681,20.066 47.327,20.066 47.632,20.371 57.411,20.371 58.092,21.051 v1(60.969,21.051) ; v1@61.006,21.049 61.331,21.374 66.408,21.374 67.513,20.269 77.811,20.269 78.269,20.726 v1(78.308,20.726)
  Bottom Layer w0.254: CON1.B47@67.313,1.153 67.399,1.153 67.615,1.369 v1(67.615,3.2)
We1*: CON1.B48 IC21.15 IC22.15 IC23.15 IC24.15 | length 93.8
  Inner 1 w0.254: v1(37.028,20.628) 40.683,24.282 45.796,24.282 48.565,21.514 51.257,21.514 52.883,19.888 v1(57.912,19.888) ; v1(68.707,3.607) 70.485,5.385 70.485,9.677 74.498,13.691 74.498,16.107 76.521,18.13 76.6,18.13 v1(78.816,20.345)
  Inner 2 w0.254: v1(19.944,21.087) 19.944,21.071 20.695,20.32 26.543,20.32 26.851,20.628 v1(37.028,20.628) ; v1(57.912,19.888) 60.946,19.888 61.022,19.812 78.283,19.812 v1(78.816,20.345)
  Bottom Layer w0.254: IC21.15@17.231,21.048 19.236,21.048 19.275,21.087 v1(19.944,21.087) ; v1(37.028,20.628) 37.068,20.628 37.417,20.977 38.131,20.977 IC23.15@38.213,21.059 ; v1(57.912,19.888) 57.884,19.916 57.884,20.36 57.858,20.386 57.858,20.596 58.243,20.981 59.089,20.981 IC22.15@59.159,21.05 ; CON1.B48@68.707,1.46 v1(68.707,3.607) ; v1(78.816,20.345) 78.844,20.373 78.886,20.373 79.536,21.024 IC24.15@80.022,21.024
pads on no net: IC2.28 IC3.28 IC4.28 IC21.28 IC22.28 IC23.28 IC24.28

## Polygon pours and split planes (outlines as drawn)
GND on Top Layer "NONET_L-01_P-001" (solid, remove dead copper, pour order 4): 16.27,1.393 16.274,1.397 83.566,1.397 83.566,4.69 83.829,4.953 77.343,4.953 76.708,5.588 62.008,5.588 59.797,3.378 58.039,5.136 58.039,5.334 51.943,5.334 50.8,4.191 50.8,4.064 50.165,4.064 48.768,5.461 34.671,5.461 33.401,6.731 33.32,6.65 22.779,6.65 21.19,5.061 20.916,5.334 17.437,5.334 16.256,4.153 16.256,1.651
RAM_VCC on Top Layer "NONET_L-01_P-001" (solid, remove dead copper, pour order 0): -2.032,27.94 100.838,27.94 100.838,0 -2.032,0
GND on Bottom Layer "NONET_L-01_P-001" (solid, remove dead copper, pour order 1): -2.032,27.94 100.838,27.94 100.838,0 -2.032,0
GND on Inner 1 "NONET_L-01_P-001" (solid, remove dead copper, pour order 2): -2.032,27.94 100.838,27.94 100.838,0 -2.032,0
GND on Inner 2 "NONET_L-01_P-001" (solid, remove dead copper, pour order 3): -2.032,27.94 100.838,27.94 100.838,0 -2.032,0

## Keep-outs
Keep-Out Layer:
  the board outline again, w0.254

## Silkscreen, mask and mechanical layers (free items; w line width, h text height)
Top Overlay:
  text "2MB VRAM" at 91.471,11.179 h1.25 r90
  text "(C) IanJ, '24" at 93.779,10.879 h1.25 r90